# Altium PCB Car Power Supply 2x Line v1.0.PcbDoc
Units mm, origin at the board's own origin, x right, y up, seen from the top; angles counter-clockwise.
Board outline 43.99 x 39 mm, 2 copper layers (Top Layer, Bottom Layer); 13 components, 8 nets, 31 pads, 0 vias.
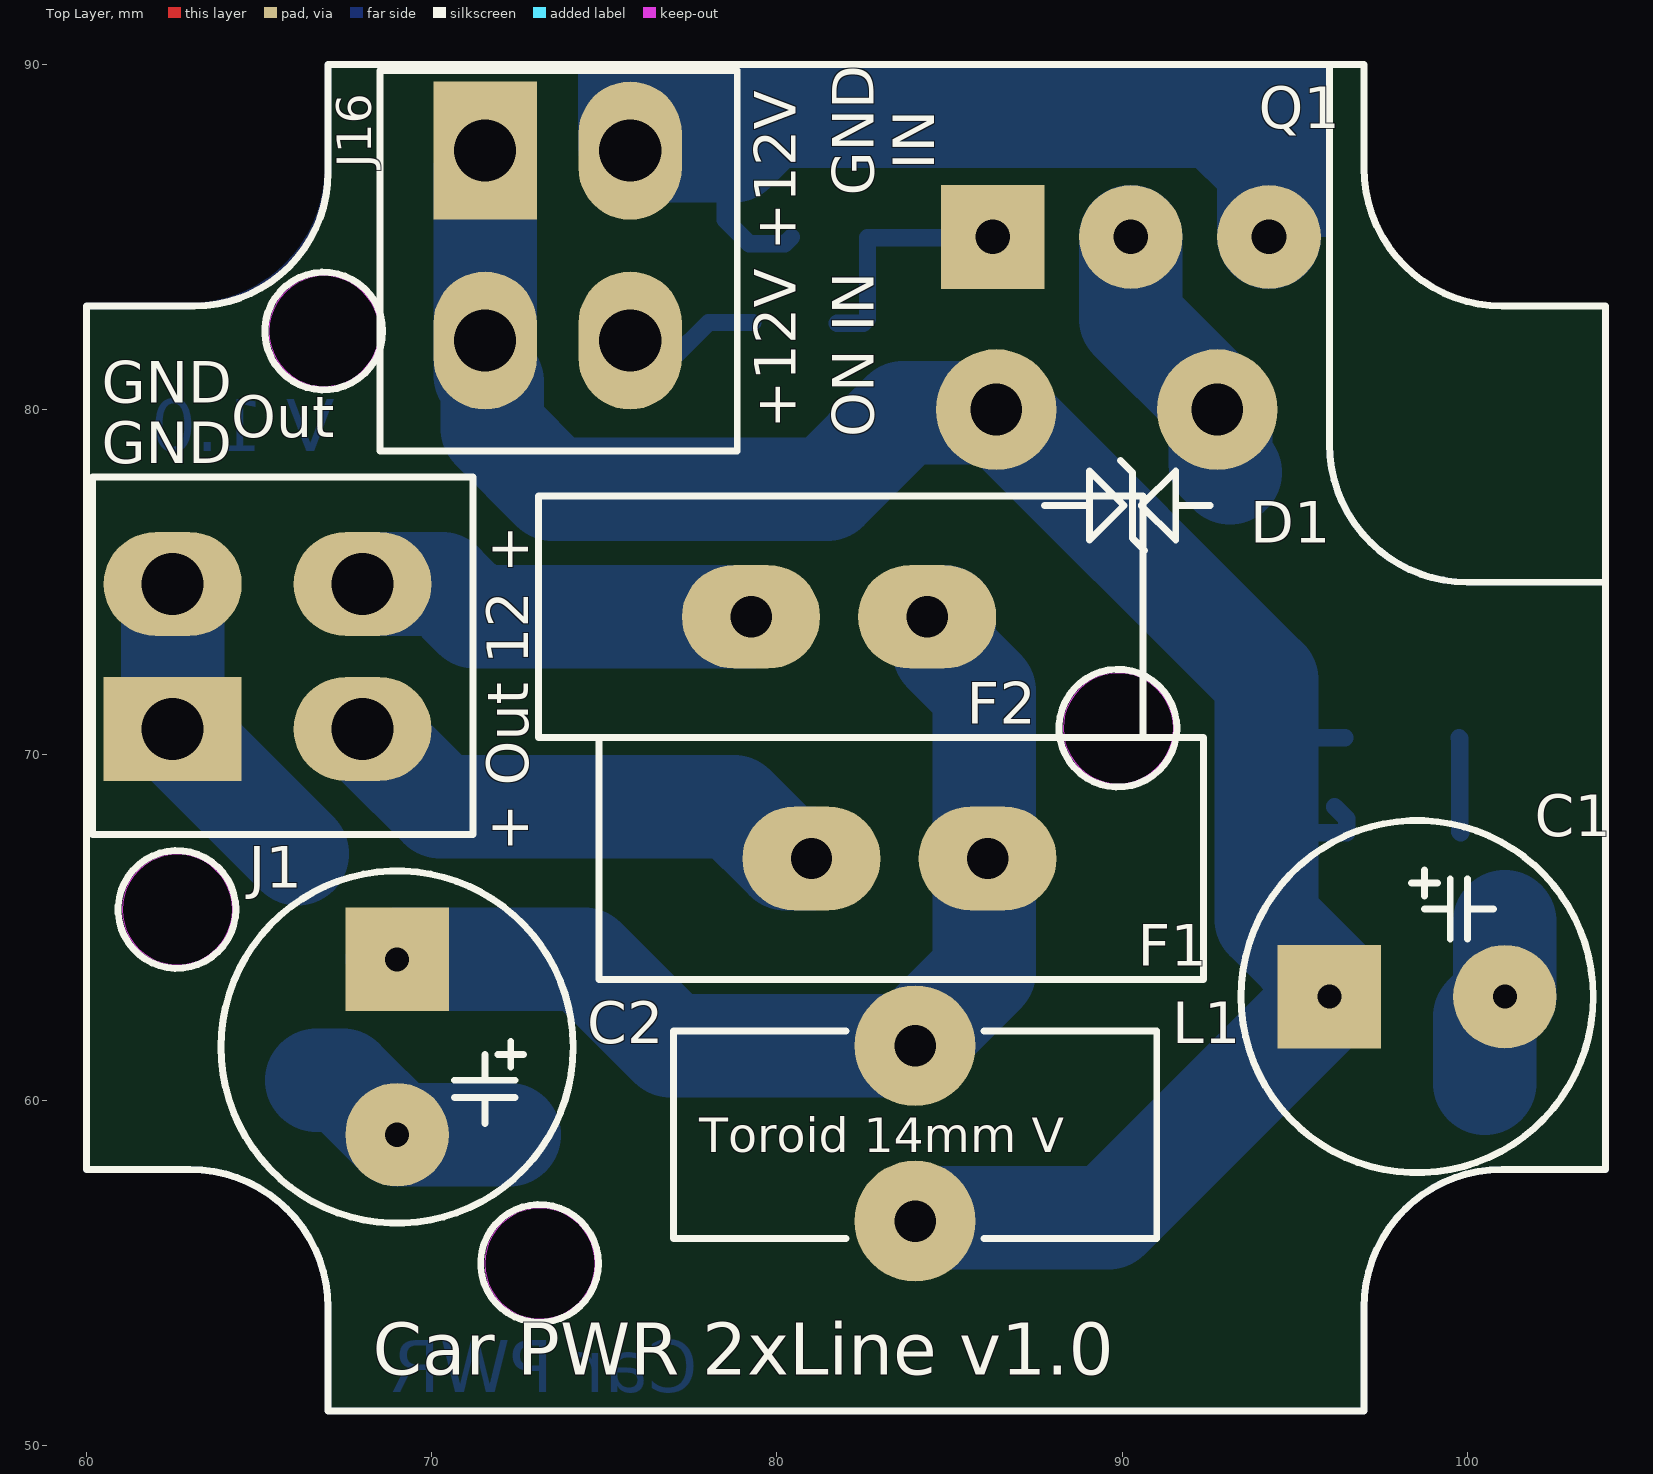
[diagram p0: Top Layer view]
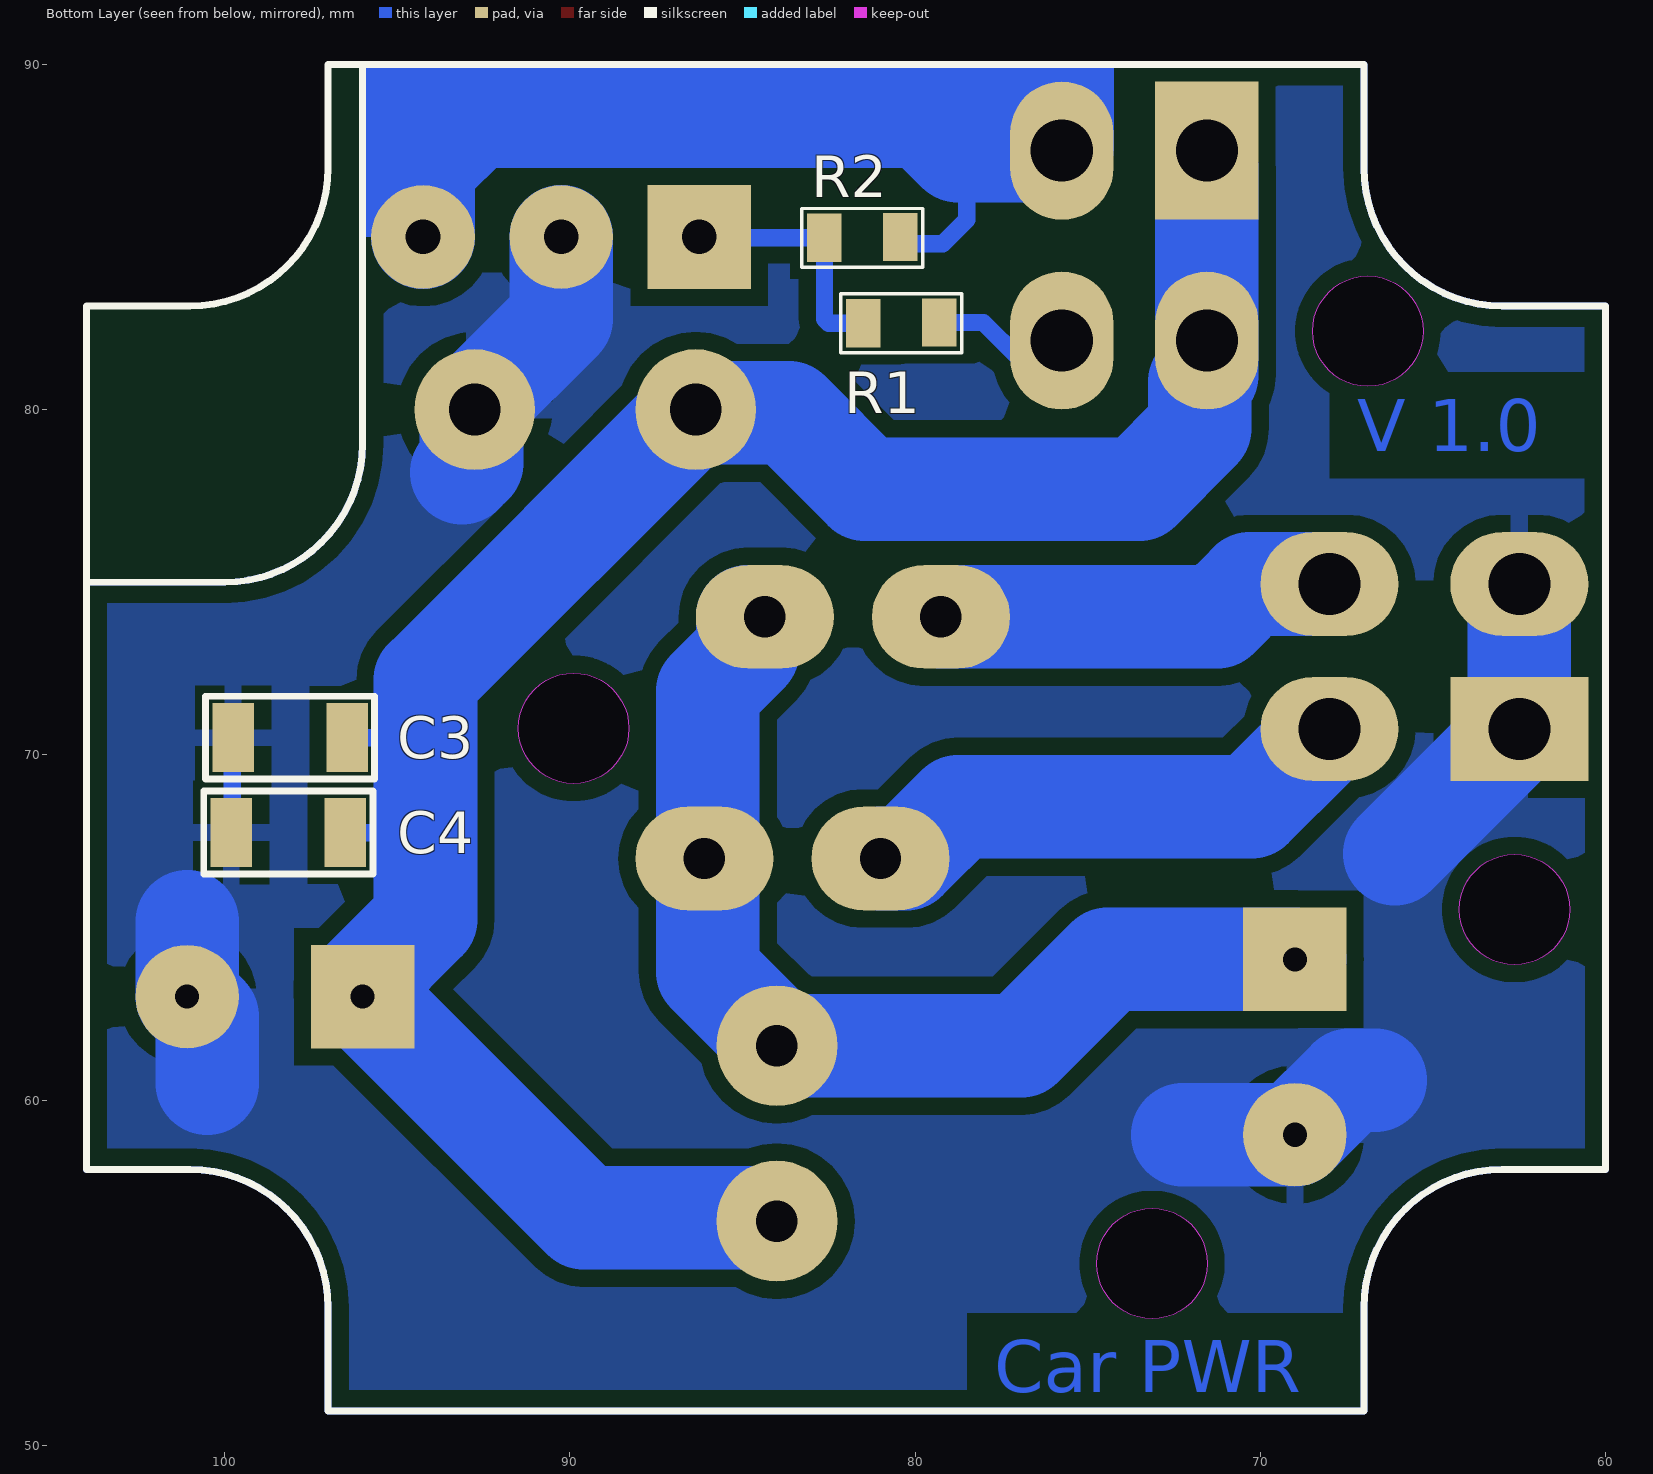
[diagram p1: Bottom Layer view, seen from below]
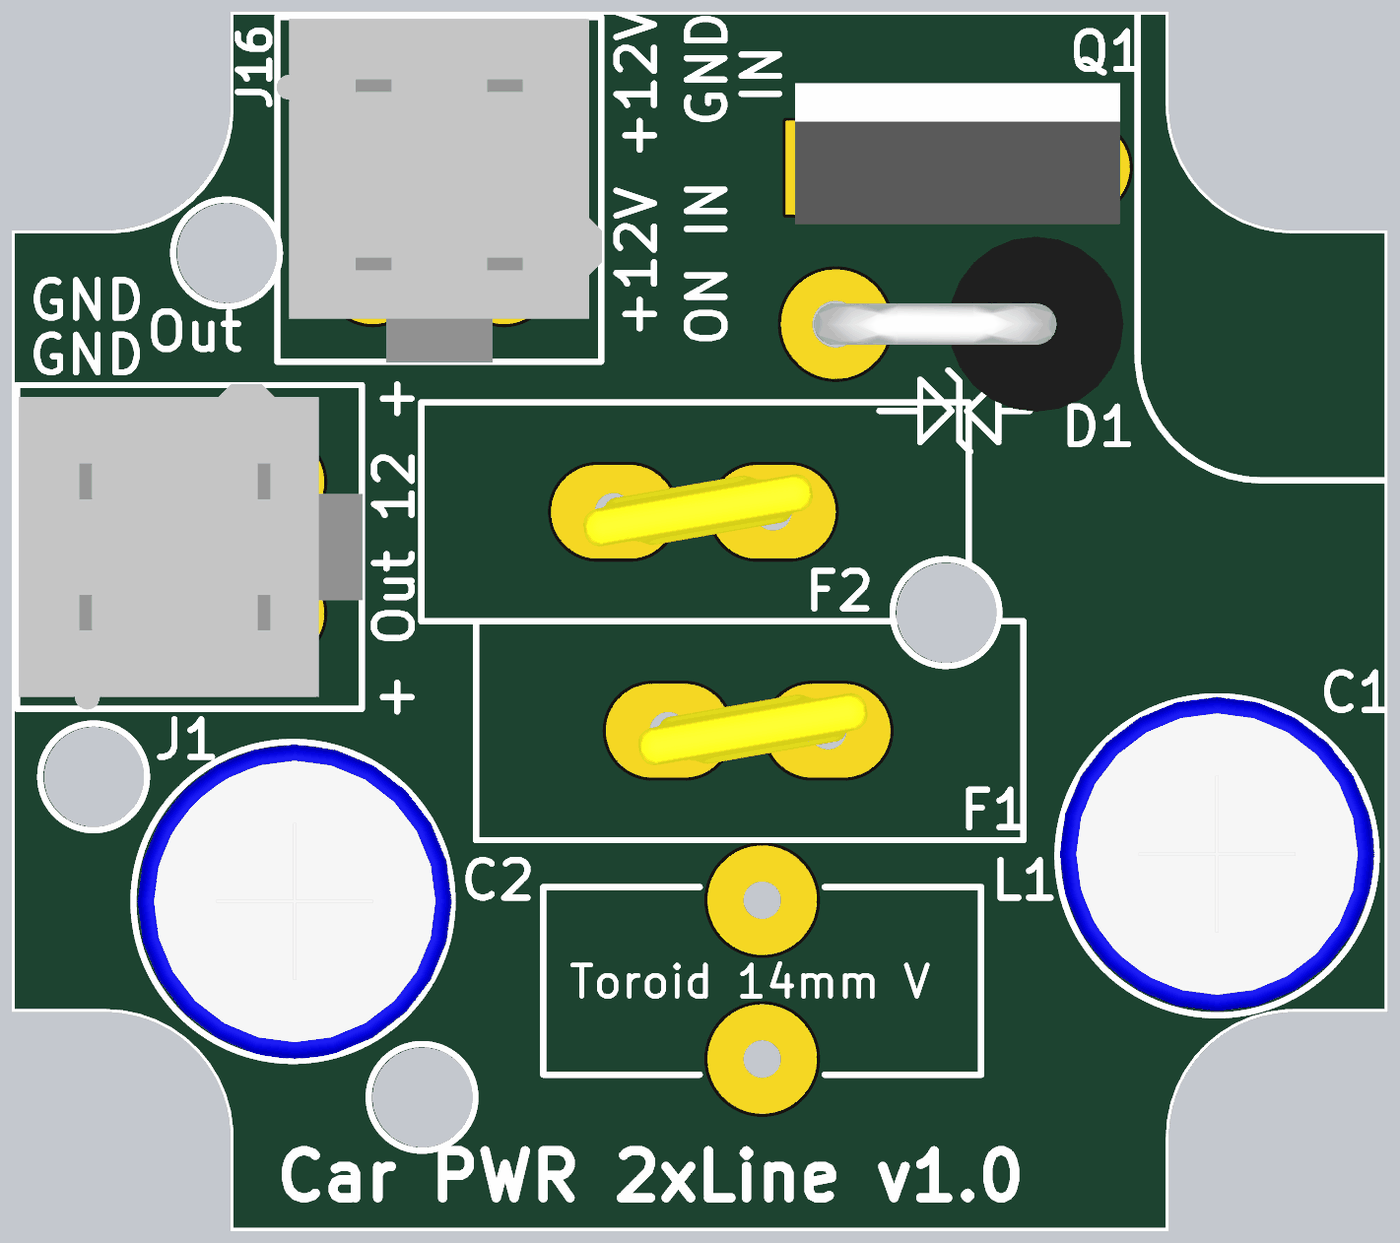
[diagram p2: 3D render of the assembled board from above, using the file's embedded part models]
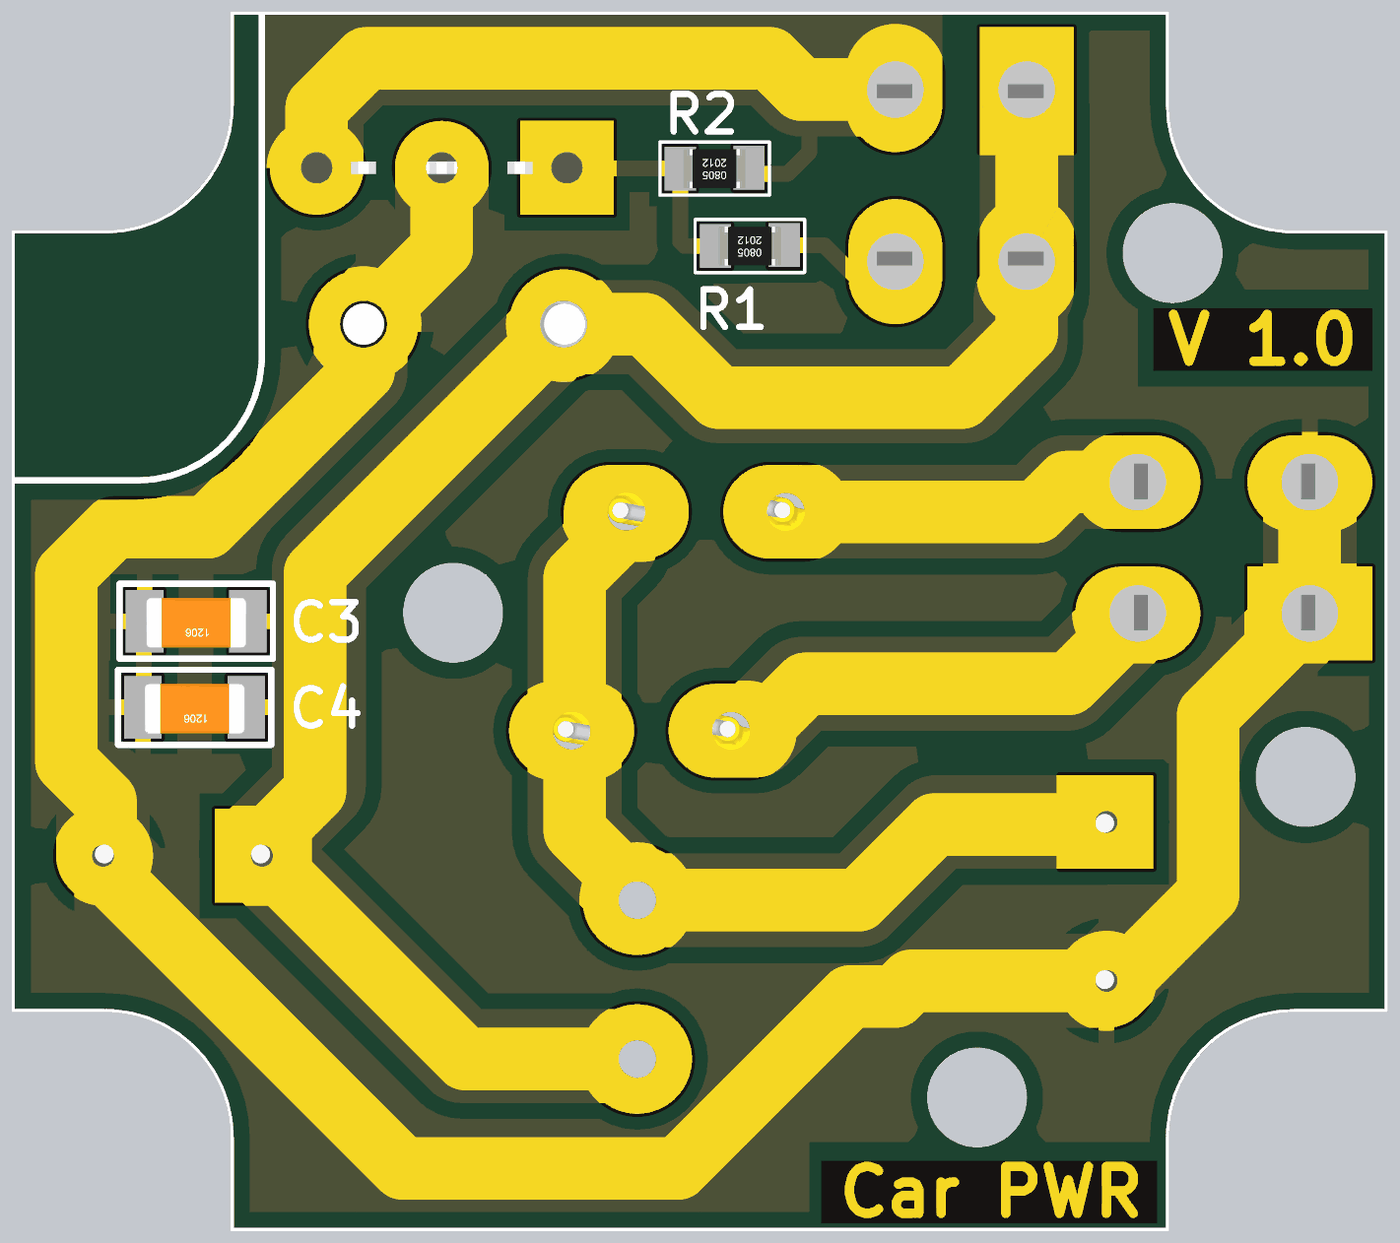
[diagram p3: 3D render of the assembled board from below, using the file's embedded part models]

## Layer stack, top to bottom
Top Solder: solder mask 0.0102, Solder Resist, Dk 3.5
Top Layer: signal copper 0.0356
Dielectric 1: dielectric 0.32, FR-4, Dk 4.8
Bottom Layer: signal copper 0.0356
Bottom Solder: solder mask 0.0102, Solder Resist, Dk 3.5

## Board outline
67,51 67,54 ccw(c63,54) 63,58 60.006,58 60.006,83 63,83 ccw(c63,87) 67,87 67,89.998 97,90 97,87 ccw(c101,87) 101,83 104,83 104,58 101,58 ccw(c101,54) 97,54 97,51
cut-out: 71.538,55.272 ccw(c73.138,55.272) 73.138,53.672 ccw(c73.138,55.272) 74.738,55.272 ccw(c73.138,55.272) 73.138,56.872 ccw(c73.138,55.272)
cut-out: 65.288,82.272 ccw(c66.888,82.272) 66.888,80.672 ccw(c66.888,82.272) 68.488,82.272 ccw(c66.888,82.272) 66.888,83.872 ccw(c66.888,82.272)
cut-out: 88.288,70.772 ccw(c89.888,70.772) 89.888,69.172 ccw(c89.888,70.772) 91.488,70.772 ccw(c89.888,70.772) 89.888,72.372 ccw(c89.888,70.772)
cut-out: 61.038,65.522 ccw(c62.638,65.522) 62.638,63.922 ccw(c62.638,65.522) 64.238,65.522 ccw(c62.638,65.522) 62.638,67.122 ccw(c62.638,65.522)

## Design rules (kind name [scope] priority, off if disabled: settings)
Clearance [All] p1: gap=0.5 ignorepadtopadclearanceinfootprint=FALSE
ComponentClearance [All] p1: gap=0.01 collisioncheckmode=3 verticalgap=0.2 showdistances=FALSE
Height [All] p1: minheight=0 maxheight=25 prefheight=12.7
HoleSize [All] p1: absolutevalues=TRUE maxlimit=3.2 minlimit=0.4 maxpercent=80.000 minpercent=20.000
HoleToHoleClearance [All] p1: gap=0.2 allowstackedmicrovias=TRUE
PlaneClearance [All] p1: clearance=0.5
PlaneConnect [All] p1: planeconnectstyle=Relief reliefexpansion=0.508 reliefentries=4 reliefconductorwidth=0.5 reliefairgap=0.5
PolygonConnect [All] p1: connectstyle=Relief reliefconductorwidth=0.5 reliefentries=4 polygonreliefangle="90 Angle" airgapwidth=0.5
RoutingVias [All] p1: holewidth=0.7 width=1.5 viastyle="Through Hole" minholewidth=0.4 minwidth=0.4 maxholewidth=3.2 maxwidth=7
SilkToSilkClearance [All] p1: silktosilkclearance=0.05
SilkToSolderMaskClearance [IsPad] p1: minsilkscreentomaskgap=0.2 clearancetoexposedcopper=TRUE
SolderMaskExpansion [All] p1: expansion=0.1 istentingtop=FALSE
Width [All] p1: maxlimit=3 minlimit=0.2 preferedwidth=0.5
22 further rules are at their usual default settings.

## Components (designator, comment, footprint, x,y, rotation, side; value= is the part's Value field where it differs from the comment)
C1 "25V 1000uF" "Cap E p5.08mm D10.2mm (3p)" 96,63 r0 top
C2 "25V 1000uF" "Cap E p5.08mm D10.2mm (3p)" 69,64.08 r270 top
C3 "10nF" "SMD 1206 (3216)" 96.45,70.5 r0 bottom
C4 "100nF" "SMD 1206 (3216)" 96.5,67.75 r0 bottom
D1 "1.5KE20CA" "TVS diode DO-201 V" 92.75,80 r180 top
F1 "A" "Fuse RGE1100" 86.1,67 r270 top
F2 "A" "Fuse RGE1100" 84.35,74 r270 top
J1 "connector" "Molex Mini-Fit Jr - 4Pin V" 62.5,74.95 r0 top
J16 "connector" "Molex Mini-Fit Jr - 4Pin V" 75.75,87.5 r270 top
L1 "Inductor V" "Toroid V D14-W6" 84,56.5 r90 top value=700uH
Q1 "IRF3205 PBf" "TO220-2 HighPower" 86.25,85 r270 top
R1 "1k Om" "SMD 0805 (2012)" 79.375,82.525 r0 bottom
R2 "10k Om" "SMD 0805 (2012)" 80.5,85 r0 bottom

## Footprints (in the part's own frame and the unit in brackets; to place one, negate y for a bottom-side part, rotate by r counter-clockwise, add the part's x,y. Pads: shape width x height; smd on the part's side, far side on the other; paste and mask are expansions set on the pad)
"Cap E p5.08mm D10.2mm (3p)" [mm] "D 10.2mm; H 17.5mm, Hole: 0.7mm"
  rect 3x3 hole 0.7: 1(0,0)
  round 3 hole 0.7: 2(5.08,0)
  silkscreen extent -2.56,-5.1 7.64,5.1, body extent -2.49,-4.97 7.57,5.08, height 16.53
"Fuse RGE1100" [mm] "Resettable 11A"
  oval 3x4 hole 1.2: 1(0,0) 2(0,-5.1)
  silkscreen extent -3.5,-11.25 3.5,6.25, body extent -1.53,-6.19 1.43,1.39, height 15
"Molex Mini-Fit Jr - 4Pin V" [mm] "Molex Mega-Fit"
  rect 4x3 hole 1.8: 1(0,-4.2)
  oval 4x3 hole 1.8: 2(0,0) 3(5.5,-4.2) 4(5.5,0)
  silkscreen extent -2.32,-7.25 8.7,3.1, body extent -2.27,-7.27 8.73,3.12, height 12.8
"SMD 0805 (2012)" [mm]
  rect 1x1.4 smd: 1(-0.075,0) 2(2.125,0.025)
  silkscreen extent -0.72,-0.82 2.78,0.87, body extent 0.03,-0.6 2.03,0.65, height 0.45
"SMD 1206 (3216)" [mm]
  rect 1.2x2 smd: 1(0,0) 2(3.3,0)
  silkscreen extent -0.8,-1.2 4.1,1.2, body extent 0.05,-0.75 3.25,0.85, height 1
"TO220-2 HighPower" [mm]
  rect 3x3 hole 1: 1(0,0)
  round 3 hole 1: 2(0,4) 3(0,8)
  body extent -2.7,-1.2 1.8,9.2, height 19
"Toroid V D14-W6" [mm] "10mm Black ring TEC.ORG"
  round 3.5 hole 1.2: 1(0,0) 2(5.08,0)
  silkscreen extent -0.5,-7 5.5,7
"TVS diode DO-201 V" [mm] "6p, p15.24mm"
  round 3.5 hole 1.5: 1(0,0) 2(6.4,0)
  silkscreen extent 0.2,1.47 5,4.07, body extent -2.8,-2.8 7.09,2.8, height 15.69

## Part data
C1 C2: library part "Cap E 1000mF x 25V", "Capacitor"
C3 C4: library part "Cap Ceramic SMD (All)", "Capacitor"
D1: library part "TVS 1.5KE20CA", "1500W Transil (TVS Diode)", Pulse Power=1500W, Breakdown V="min 19 max 21", Load A=5, PackageReference=DO-201, Stand-Off V=17.1
F1 F2: library part Fuse, "Round fuse"
J1 J16: library part "Molex Mini-Fit Jr - 4 pin", "Right, Dbl line, Female"
L1: "Inductor Vertical", Code_IEC=1005, Code_JEITA=0402, LatestRevisionDate=29-May-2009, LatestRevisionNote="IPC-7351 Footprint Added.", PackageDescription="Chip Inductor", PackageReference=0402-A, Published=8-Jun-2000, Publisher="Altium Limited"
Q1: library part IRF3205, "N-Channel 55V - 0.008Ω - 110A", I d - Drain current (continuous) at TC = 25°C="110 A", I d - Drain current (continuous) at TC = 100°C="80 A", C ISS Входная емкость="3247 pF", C OSS Выходная емкость="781 pF", DataSheet=http://tec.org.ru/_bd/2/223_IRF3205.pdf, Monufacturer=IOR, Name="IRF3205 PBf", RDS Сопротивление Сток-Исток="0.008 Om", URL=http://tec.org.ru/board/49-1-0-223, V DSS (v)=55V, VGS Макс напр на гейте="+-20 V", VGS Порог Открытия="+2....+4 V"
R1 R2: library part "Res All Types"

## Nets (pads, with @x,y where several pads share a name; then routed paths per layer and width w, separated by ;. In a path a pad name is that pad's centre, name@x,y a point inside that pad or via, vN(x,y) a via of type N, cw(c..) or ccw(c..) an arc to the next point about the centre after c; other vN are vias at no path point)
+12V: C1.1 C3.1 C4.1 D1.2 J16.1 J16.3 L1.1 | length 65
  Bottom Layer w0.5: 94.179,67.75 C4.1 96.5,68.15 C4.1@96.15,68.5 ; 94.25,70.5 C3.1
  Bottom Layer w3: J16.1@71.55,87 J16.3 71.55,81 71.75,80.8 71.75,79.457 73.507,77.7 81.45,77.7 83.654,79.904 86.254,79.904 D1.2 94.179,72.171 94.179,67.75 94.179,65.241 96,63.42 C1.1 89.596,56.596 84.096,56.596 L1.1
"+12V No Noise 1": F1.2 J1.3 | length 14.8
  Bottom Layer w3: J1.3 68.033,70.75 68.083,70.7 68.5,70.7 68.5,70.257 70.257,68.5 78.75,68.5 80.25,67 F1.2
"+12V No Noise 2": F2.2 J1.4 | length 11.6
  Bottom Layer w3: J1.4 70.3,74.95 71.25,74 F2.2
GND: C1.2 C2.2 C3.2 C4.2 D1.1 J1.1 J1.2 Q1.2 | length 31.5
  Bottom Layer w0.5: C3.2 99.775,70.475 99.775,67.775 C4.2
  Bottom Layer w3: J1.2 J1.1 63,70.75 63,70.251 65.881,67.37 66.112,67.138 ; 66.67,60.58 67.42,60.58 C2.2 72.25,59 ; Q1.2 90.25,82.635 92.75,80.135 D1.1 92.846,79.904 92.846,78.454 93.121,78.179 ; 100.5,60.488 100.5,62.42 C1.2 101.08,65.17
"GND In": J16.2 Q1.3 R2.1 | length 24.8
  Bottom Layer w0.5: 78.5,86.5 78.5,85.5 79.196,84.804 80.229,84.804 R2.1
  Bottom Layer w3: J16.2 78.75,87.5 79.75,88.5 92.75,88.5 94.25,87 Q1.3
NetC2_1: C2.1 F1.1 F2.1 L1.2 | length 30.4
  Bottom Layer w3: C2.1 74.42,64.08 76.92,61.58 L1.2 84,61.715 86,63.715 F1.1@86,67 ; F2.1 84.85,74 84.85,73 86,71.85 F1.1@86,67 ; F1.1 F1.1@86,67
NetQ1_1: Q1.1 R1.2 R2.2 | length 8.1
  Bottom Layer w0.5: R1.2@81.75,82.5 82.5,82.5 82.625,82.625 R2.2 86.225,84.975 Q1.1 Q1.1@87.42,85
"ON Ingition": J16.4 R1.1 | length 4
  Bottom Layer w0.5: J16.4@75.75,81.5 77,81.5 78.025,82.525 R1.1
copper on no net: | length 117.9
  Bottom Layer w0.2: 60,68.75 60,58 63,58 cw(c63,54) 67,54 67,51 97,51 97,54 cw(c101,54) 101,58 104,58 104,75 100,75 cw(c100,79) 96,79 96,83.5 ; 60.006,76.994 60.006,83 63,83 ccw(c63,87) 67,87 67,89.998 69.498,89.998

## Polygon pours and split planes (outlines as drawn)
GND on Bottom Layer "GND_L02_P000" (solid, pour order 0): 60,58 63,58 cw(c63,54) 67,54 67,51 97,51 97,54 cw(c101,54) 101,58 104,58 104,75 100,75 cw(c100,79) 96,79 96,90 96.002,89.998 67,89.998 67,87 cw(c63,87) 63,83 60.006,83

## Other copper
Top Layer:
  text ".Layer_Name" at 92.25,92.5 h1
Bottom Layer:
  region net "GND In": 94.25,85 96,85 96,89.997 74.25,90 74.25,87.5 94.25,87.5
  text ".Layer_Name" at 75,92.75 h1
  text "V 1.0" at 67.2,78.8 h1.5
  text "Car PWR" at 77.7,51.55 h1.5

## Silkscreen, mask and mechanical layers (free items; w line width, h text height)
Top Overlay:
  circle w0.2: c73.125,55.275 r1.706
  circle w0.2: c66.875,82.275 r1.706
  circle w0.2: c89.875,70.775 r1.706
  circle w0.2: c62.625,65.525 r1.706
  lines w0.2: 60,58 63,58 cw(c63,54) 67,54 67,51 97,51 97,54 cw(c101,54) 101,58 104,58 104,75 ; 60.006,58 60.006,83 63.132,83 ccw(c63.132,86.868) 67,86.868 67,89.998 96.002,89.998 ; 96,90 96,79 ccw(c100,79) 100,75 104,75 ; 96.002,90 97,90 97,87 ccw(c101,87) 101,83 104,83 104,75
  text ".Layer_Name" at 92.25,92.5 h1
  text "IN" at 84.55,86.95 h1.2 r90
  text "GND" at 82.8,86.2 h1.2 r90
  text "GND" at 60.45,80.2 h1.2
  text "+12V +12V" at 80.55,79.45 h1.2 r90
  text "Out" at 64.2,79.2 h1.2
  text "ON IN" at 82.8,79.2 h1.2 r90
  text "GND" at 60.45,78.45 h1.2
  text "+ Out 12 +" at 72.8,67.2 h1.2 r90
  text "Car PWR 2xLine v1.0" at 68.3,52.05 h1.5
Bottom Overlay:
  lines w0.2: 60,58 63,58 cw(c63,54) 67,54 67,51 97,51 97,54 cw(c101,54) 101,58 104,58 104,75 ; 60.006,58 60.006,83 63,83 ccw(c63,87) 67,87 67,89.998 96.002,89.998 ; 96,90 96,79 ccw(c100,79) 100,75 104,75 ; 96.002,90 97,90 97,87 ccw(c101,87) 101,83 104,83 104,75
  text ".Layer_Name" at 75,92.75 h1
Top Solder:
  text ".Layer_Name" at 92.25,92.5 h1
Bottom Solder:
  region: 67.5,78.5 67.5,80.5 60.5,80.5 60.5,78.5
  region: 78.125,51.25 78.125,53.25 67.375,53.25 67.375,51.25
  lines w2: 62.5,74.95 62.5,70.75 65.75,67.5 65.75,61.775 66.775,60.75 68.675,58.85 69.15,58.85 69.3,59 75.25,59 75.75,58.5 77.2,58.5 82.7,53 91.5,53 99.25,60.75 101,62.5 101,64.75 102.25,66 102.25,72 100.75,73.5 97.75,73.5 92.75,78.5 92.75,80 92.675,80 90.25,82.425 90.25,85 ; 68,74.95 70.275,74.95 71.225,74 79.25,74 ; 68.225,70.475 70.2,68.5 78.625,68.5 80.125,67 81,67 ; 69.08,64 74.5,64 76.92,61.58 84,61.58 84,61.8 86,63.8 86,71.9 84.35,73.55 84.35,74 ; 71.55,87.5 71.55,79.725 73.625,77.65 81.4,77.65 83.75,80 86.35,80 94.3,72.05 94.3,65.075 96.187,63.187 89.5,56.5 84,56.5 ; 75.75,87.5 78.75,87.5 79.75,88.5 92.675,88.5 94.25,86.925 94.25,85
  text ".Layer_Name" at 75,92.75 h1
Mechanical 2:
  text "44x39x23 mm" at 61,95.25 h1
  text "T O P" at 86,94.5 h2.7
  text ":case G101 Gainta Alu" at 60.975,93.475 h1
  text ".Pcb_File_Name_No_Path" at 60,91 h1
Mechanical 3:
  text "44x39x23 mm" at 104,95 h1
  text "T O P" at 74.75,94.75 h2.7
  text ":case G101 Gainta Alu" at 104,92.942 h1
  text ".Pcb_File_Name_No_Path" at 103.619,91.446 h1

## Dimensions
60,51 to 104,51 on Mechanical 3
60,90 to 60,51 on Mechanical 3
60,90 to 60,51 on Mechanical 2
60,51 to 104,51 on Mechanical 2

## Text inside footprints (layer, text, board x,y; h text height)
L1: Top Overlay "Toroid 14mm V" at 77.75,58.5 h1